# Altium PCB PROC091F.PcbDoc (part 4 of 8)
Units mil, origin at the board's own origin, x right, y up, seen from the top; angles counter-clockwise.
Board outline 3590.95 x 906.17 mil, 8 copper layers (Top Layer, GND1, Sig1, PWR1, PWR2, Sig2, GND2, Bottom Layer), stack 63.146 mil thick; 420 components, 316 nets, 1432 pads, 774 vias.
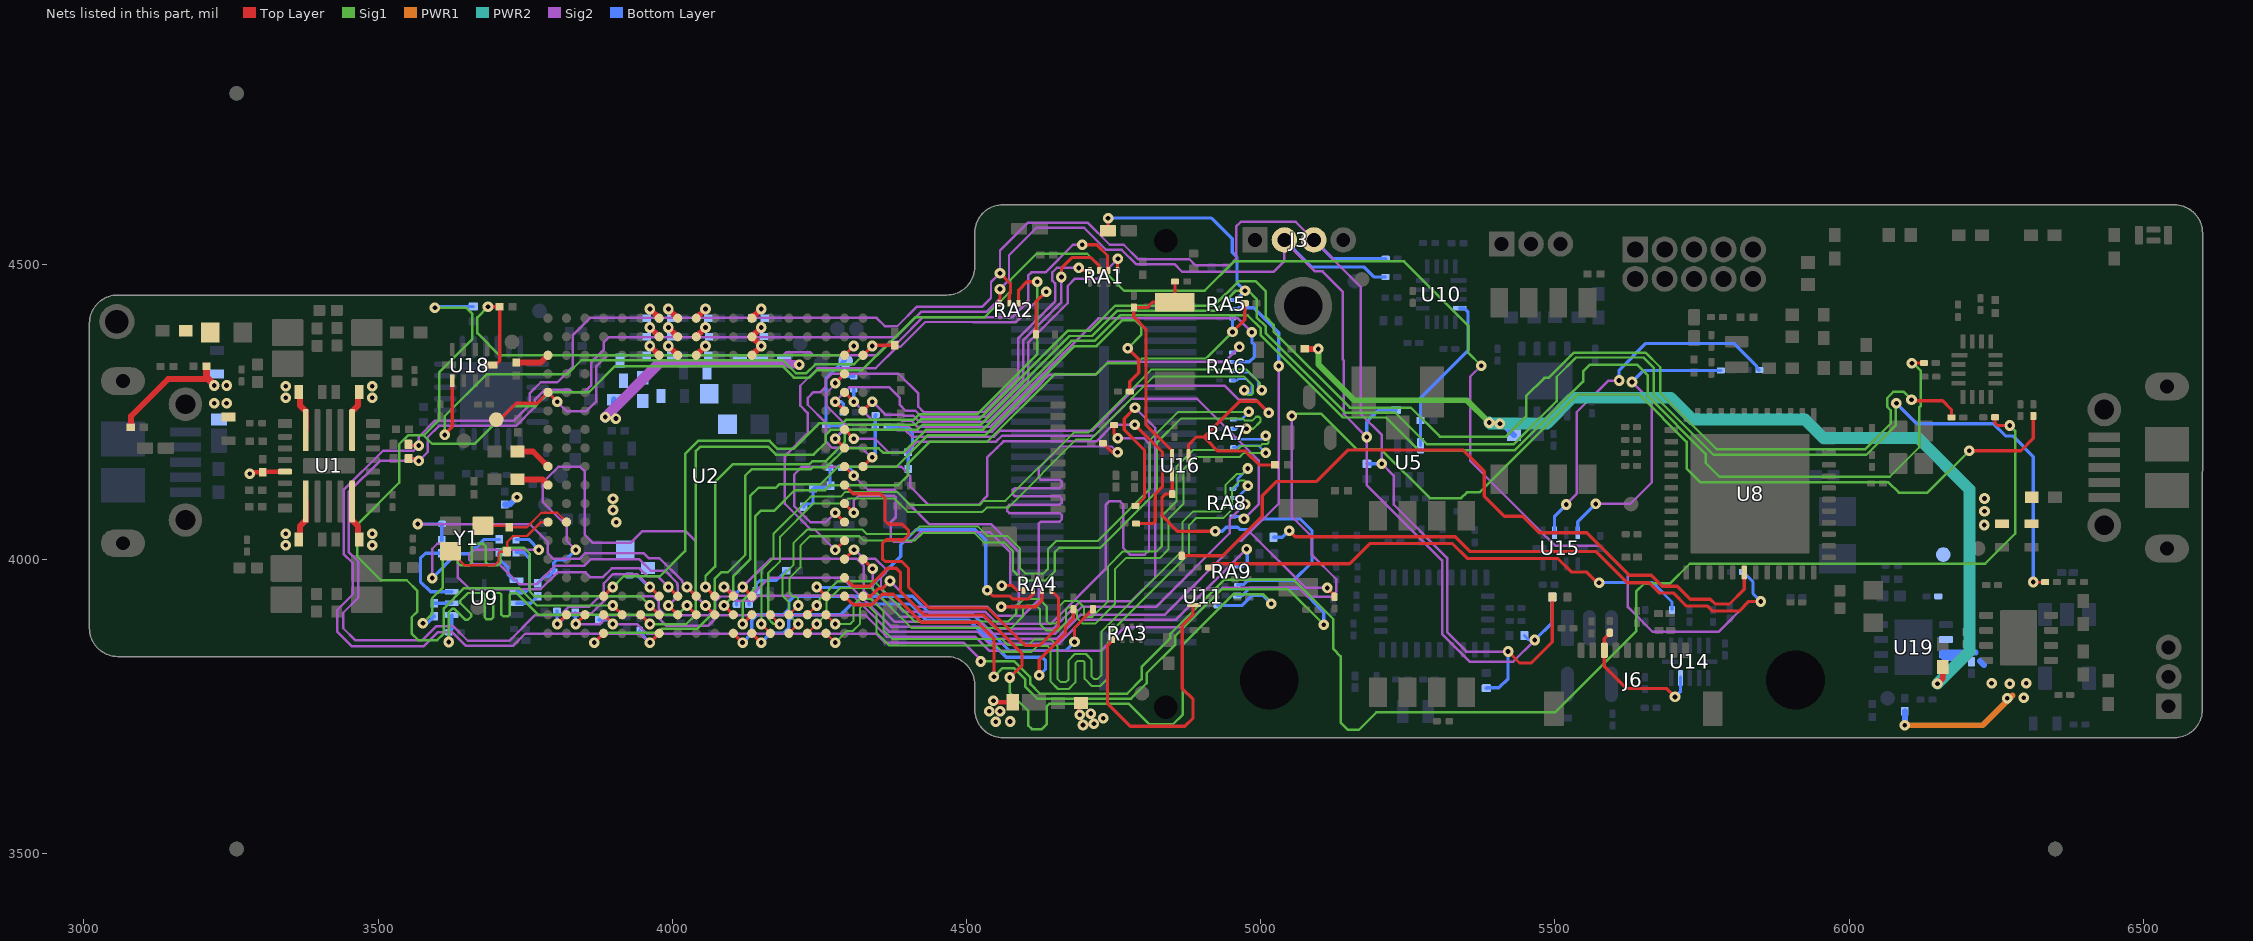
[diagram p9: the nets of this part, all layers, seen from the top]

## Via types
v1: diameter 18, hole 8, Top Layer to Bottom Layer, tented both sides, 737 vias
v2: diameter 19.68, hole 7.87, Top Layer to Bottom Layer, tented both sides, 36 vias
v3: diameter 17, hole 8, Top Layer to Bottom Layer, tented both sides, 1 vias

## Nets (pads, with @x,y where several pads share a name; then routed paths per layer and width w, separated by ;. In a path a pad name is that pad's centre, name@x,y a point inside that pad or via, vN(x,y) a via of type N, cw(c..) or ccw(c..) an arc to the next point about the centre after c; other vN are vias at no path point) (continued)
5V_IN: C1.2 C4.1 C30.1 C50.1 C51.1 C52.1 C53.1 D1.1 D2.1 FL3.2 FL12.2 R39.1 R50.2 R64.1 R107.1 U1.9 U1.13 U1.18 U1.22 U1.26 | length 2301.2
  Top Layer w8: v1(3282,4145) 3284.5,4147.5 C30.1@3304,4147.5 3305.18,4148.68 U1.18@3341.81,4148.68 ; v1@4551.43,3756.69 4551.24,3756.88 D2.1@4578.64,3756.88
  Top Layer w10: R39.1@3079.65,4222.86 3080.01,4222.86 3080.01,4242.86 3142.95,4305.8 3209.86,4305.8 ; C52.1@3367.11,4033.27 3367.11,4055.68 3377.24,4065.81 U1.22@3377.24,4097.89 ; C51.1@3367.11,4283.77 3367.11,4261.36 3377.24,4251.23 U1.13@3377.24,4219.15 ; U1.26@3455.98,4097.89 3455.98,4065.81 3466.11,4055.68 C53.1@3466.11,4033.27 ; U1.9@3455.98,4219.15 3455.98,4251.23 3466.11,4261.36 C50.1@3466.11,4283.77 ; R107.1@5074.64,4357.18 v1@5098.17,4357.18 ; v1(5098,4357.17) v1@5098.15,4357.17 ; v1(6150,3788) 6159,3797 FL3.2@6159,3816.31
  Top Layer w12: R50.2@3208.43,4327.73 3208.43,4309.08 v1@3222.57,4294.93
  Sig1 w10: v1(5098,4357.17) 5098,4331 5159,4270 5350.21,4270 v1(5388.21,4232)
  PWR2 w20: v1(5388.21,4232) 5389.98,4230.23 v1(5406.56,4230.23) 5486,4230.23 5529.77,4274 5697,4274 5734,4237 5925,4237 5956,4206 6117,4206 6204.39,4118.61 6204.39,3842.39 v1(6150,3788)
  Bottom Layer w10: R64.1@3715.38,4092.76 3723.59,4092.76 v1(3736.09,4105.26) ; v1@5408.87,4232 FL12.2@5430.41,4210.46
  other v1: 4549.8,3723.5 4574.04,3724.04 4557.1,3741.4 4538.79,3741.55 4545.8,3759.4 3343.32,4023.52 3489.9,4023.52 3343.32,4043.02 3489.9,4043.02 3221.57,4264.93 3242.57,4264.93 3343.32,4274.02 3489.9,4274.02 3343.32,4293.52 3489.9,4293.52 3221.57,4294.93 3242.57,4294.93
5V_IN_B: C42.2 C122.1 C127.1 FL14.2 TP4.1 U19.6
  other v1: 6229.39,4058 6230,4081.54 6230,4103
5V_IN_SW: C129.1 FL11.1 R27.1 U19.7 | length 387.8
  Top Layer w6: v1@4691.08,3733.43 FL11.1@4691.08,3755.5
  PWR1 w10: v1(6094.58,3717.68) 6227.1,3717.68 6277.87,3768.45
  Bottom Layer w10: v1(6094.58,3717.68) R27.1@6094.58,3741.52 ; U19.7@6157.3,3840.2 6158.2,3841.1 6198.3,3841.1 ; U19.7@6157.5,3836.1 6162.01,3831.6 6191.4,3831.6 6186.3,3836.69 U19.7@6161.94,3836.69 ; 6200,3839.4 6198.3,3841.1 ; 6215.1,3841.1 6198.3,3841.1 ; 6222.1,3826.76 6228.92,3819.94
  other v1: 4698.06,3717.99 4716.52,3720.32 4732.55,3729.58 4692.44,3735.48 4711.02,3737.49 6268.5,3763.5 6296.5,3764.5 6273,3788 6242,3789 6301,3789
ALERT: R38.1 U5.3 U10.4 | length 277.2
  Bottom Layer w5.5: U5.3@5271.66,4192.9 R38.1@5271.66,4235.46 5271.66,4274.01 5352.46,4354.8 5352.46,4419.82 5346.17,4426.11 U10.4@5338.3,4426.11
AR_1P0_RF1: C78.1 C79.1 C80.1 C81.1 L12.2 U2.J16 U2.J17 U2.J18 | length 66.8
  Top Layer w10: U2.J16@4040.73,4346.33 v1(4056.48,4362.08) ; U2.J17@4040.73,4377.83 v1(4056.48,4393.58) ; U2.J18@4040.73,4409.33 v1(4056.48,4425.07)
AR_1P0_RF2: C82.1 C83.1 C84.1 C85.1 FL1.1 L14.2 U2.H16 U2.H17 U2.H18 | length 66.8
  Top Layer w10: v1(3993.49,4362.08) U2.H16@4009.24,4346.33 ; v1(3993.49,4393.58) U2.H17@4009.24,4377.83 ; v1(3993.49,4425.07) U2.H18@4009.24,4409.33
AR_1P2: FL6.1 L13.2
AR_1V4_APLL: C90.1 U2.A10 | length 62.3
  Top Layer w10: C90.1@3737.06,4182.85 3763.27,4182.85 U2.A10@3788.76,4157.36
AR_1V4_SYNTH: C89.1 U2.A9 | length 55.5
  Top Layer w10: C89.1@3737.19,4135.45 3779.18,4135.45 U2.A9@3788.76,4125.86
AR_1V8: FL8.1 FL9.1 FL10.1 L11.2 | length 404.6
  Sig2 w15: 3975.42,4330.59 3976.08,4331.25 ; 3976.08,4332.75 4199.24,4332.75 ; 4199.24,4331.25 4199.33,4331.16 4215.39,4331.16 v1(4215.96,4330.59)
  Sig2 w18: v1(3886.15,4241.31) 3975.42,4330.59
  Bottom Layer w10: v1(3886.15,4241.31) 3888.61,4241.31 3901,4253.7 FL9.1@3901,4271
  other v1: 3904.64,4062.7 3899.25,4083.38 3899.25,4102.38 3904.29,4238.76
AR_BSS_LOGGER: RA2.2 U2.D3 | length 1197.9
  Top Layer w5.5: U2.D3@3883.25,3936.89 v1(3899,3952.63) ; RA2.2@4588.48,4434.82 4588.48,4456.94 4602.74,4471.2 v1(4620,4471.2)
  Sig1 w4.2: v1(3899,3952.63) 3917.29,3970.92 3979.16,3970.92 4021.78,4013.55 4021.78,4178.81 4043.81,4200.84 4165.39,4200.84 4179.07,4187.16 4205.95,4187.16 4249.28,4230.49 4288.94,4230.49 4295.15,4236.7 4409.94,4236.7 4419.12,4245.88 4517.88,4245.88 4620,4348 v1(4620,4471.2)
AR_CS1: R9.2 R139.2 U2.C2 | length 3331.6
  Top Layer w5.5: v1(3836.01,3889.64) U2.C2@3851.76,3905.39 ; v1(6204,4184) 6292,4184 6313,4205 R139.2@6313,4242.98
  Sig1 w4.2: v1(5053,4243.3) 5057,4247.3 5102.7,4247.3 5164.32,4185.68 5205.42,4185.68 5287.4,4103.7 5340.7,4103.7 5350.29,4113.29 5371.69,4113.29 5538.09,4279.7 5643.45,4279.7 5723.89,4199.26 5723.89,4154.03 5747.43,4130.49 6066.87,4130.49 6084.43,4112.93 6132.93,4112.93 v1(6204,4184)
  Sig2 w4.2: v1(3836.01,3889.64) 3877.36,3889.64 3892.66,3904.94 3972.04,3904.94 3990.46,3886.52 4060.75,3886.52 4079.18,3904.94 4328.02,3904.94 4364.57,3868.39 4514.72,3868.39 4539.2,3843.9 4728.57,3843.9 4768.67,3884 4868,3884 4935,3951 5064.76,3951 5080.06,3935.7 5119.48,3935.7 5128.45,3944.66 5128.45,3965.78 5087,4007.23 5087,4038 5053,4072 v1(5053,4243.3)
  Bottom Layer w5.5: R9.2@3835,3909.17 3835,3890.65 v1(3836.01,3889.64)
AR_CS1_60PIN: RA3.1 U11.3 | length 486.5
  Top Layer w5.5: RA3.1@4749.31,3863.01 4739.81,3853.51 4739.81,3754.36 4778.08,3716.09 4871.09,3716.09 4885,3730 4885,3761.65 4866.65,3780 4866.65,3886.76 4884.99,3905.09 U11.3@4884.99,3921.94
AR_CS1_BT: R105.2 U8.30 | length 1222.9
  Top Layer w5.5: R105.2@4865.78,4005.59 4935.59,4005.59 5002.56,4072.56 5002.56,4107.46 5027.1,4132 5094.9,4132 5148.45,4185.56 5343.25,4185.56 5379.8,4149.01 5379.8,4107.15 5414.23,4072.71 5445.66,4072.71 5473.46,4044.92 5554.09,4044.92 5626.54,3972.46 5663.74,3972.46 5682.22,3953.98 5707.75,3953.98 5730.02,3931.71 5764.22,3931.71 5772.3,3923.63 5796.62,3923.63 5821.73,3948.74 U8.30@5821.73,3977.25
AR_CS1_LCD: R76.2 R106.2 | length 857.3
  Top Layer w5.5: R106.2@4912.37,3985.56 4918.93,3992.13 5151.04,3992.13 5185.33,4026.43 5325.91,4026.43 5351.12,4001.21 5504.41,4001.21 5527.37,3978.25 5553.48,3978.25 5571.73,3960 v1(5575,3960)
  Bottom Layer w5.5: v1(5575,3960) 5666.02,3960 5698.97,3927.05 R76.2@5698.97,3914.47
AR_CS1_LCD_T: J6.3 R183.1 U14.4 | length 239.1
  Top Layer w5.5: R183.1@5593.19,3873.82 5583.95,3864.58 J6.3@5583.95,3845.06 5583.95,3818.24 5622.3,3779.89 5689.95,3779.89 v1(5704.03,3765.81)
  Bottom Layer w5.5: v1(5704.03,3765.81) 5713.48,3775.26 U14.4@5713.48,3797.8 U14.4@5713.48,3799.77
AR_DMM_CLK: R11.1 U2.U3 | length 1270.4
  Top Layer w5.5: U2.U3@4292.7,3936.89 4307.32,3922.26 4338.99,3922.26 4357.08,3940.36 4375.65,3940.36 4423.2,3892.8 4518.93,3892.8 4546.57,3865.15 v1(4546.57,3799.81)
  Sig1 w4.2: v1(4546.57,3799.81) 4561.46,3814.7 4580.9,3814.7 4600.07,3795.53 4600.07,3782.93 4620.19,3762.81 4779.81,3762.81 4806,3789 4806,3806 4855,3855 4855,3869.71 4934.29,3949 5046.57,3949 v1(5107.05,3888.52)
  Bottom Layer w5.5: R11.1@4960.02,3937.94 4968.46,3937.94 4980.77,3950.25 5066.75,3950.25 5107.05,3909.95 v1(5107.05,3888.52)
AR_DMM_SYNC: R10.1 U2.U4 | length 1283.7
  Top Layer w5.5: U2.U4@4292.7,3968.38 4307.32,3953.76 4335.57,3953.76 4366.31,3984.5 4380.6,3984.5 4388,3977.1 4388,3944.27 4427.07,3905.2 4528.29,3905.2 4594.49,3839 4594.49,3819.69 v1(4573.55,3798.74)
  Sig1 w4.2: v1(4573.55,3798.74) 4573.55,3773.45 4605,3742 4605,3717 4611,3711 4628,3711 4636,3719 4636,3749.41 4641,3754.41 4775.59,3754.41 4810.94,3719.06 4850.56,3719.06 4867.66,3736.15 4867.66,3854.66 4953.6,3940.6 5004,3940.6 5018,3926.6 v1(5018,3924)
  Bottom Layer w5.5: R10.1@4927.02,3921 4967.78,3921 4985.53,3938.75 5003.25,3938.75 v1(5018,3924)
AR_DP0: R88.1 U2.U7 | length 1102
  Top Layer w5.5: v1(4276.95,4078.62) U2.U7@4292.7,4062.87 ; v1(4786.14,4228.21) 4833.25,4181.1 4833.25,4123.66 4820.91,4111.32 4820.91,4064.23 4817.01,4060.33 R88.1@4789.21,4060.33
  Sig2 w4.2: v1(4276.95,4078.62) 4261.23,4062.89 4234.4,4062.89 4207.08,4090.21 4207.08,4100.94 4207.08,4111.59 4207.08,4143.33 4220.78,4157.04 4389.09,4157.04 4404.46,4141.67 4404.46,4123.28 4435.52,4092.22 4519.97,4092.22 4535.14,4107.38 4535.14,4172.74 4551.69,4189.3 4551.95,4189.3 4562.68,4200.02 4721.12,4200.02 4749.31,4228.21 v1(4786.14,4228.21)
AR_DP1: R130.1 U2.U6 | length 924.9
  Top Layer w5.5: v1(4276.95,4015.63) U2.U6@4292.7,4031.37 ; R130.1@4617.95,4383.18 4617.95,4437.33 4635.19,4454.56 v1(4635.35,4454.4)
  Sig2 w4.2: v1(4276.95,4015.63) 4242.74,4049.83 4235.58,4049.83 4191.3,4094.11 4191.3,4175.11 4230,4213.81 4230,4248.45 4217.54,4260.92 4217.54,4294.54 4247.25,4324.25 4345.44,4324.25 4381.77,4360.58 4387.52,4360.58 4429.85,4402.91 4475.18,4402.91 4511.29,4402.91 4511.35,4402.85 4583.81,4402.85 v1(4635.35,4454.4)
AR_DP2: R132.1 U2.V5 | length 1098.3
  Top Layer w5.5: U2.V5@4324.64,3999.43 v1(4340.39,3983.68) ; v1(4786.37,4257.18) 4768.03,4238.84 4768.03,4219.51 4802.49,4185.05 4802.49,4104.7 R132.1@4788.36,4090.57
  Sig2 w4.2: v1(4340.39,3983.68) 4340.39,3948.49 4386.9,3901.99 4528.64,3901.99 4548.94,3881.69 4646.96,3881.69 4694,3928.72 4780.31,3928.72 4820.7,3969.11 4820.7,4222.85 v1(4786.37,4257.18)
AR_DP3: R133.1 U2.U5 | length 1103.4
  Top Layer w5.5: U2.U5@4293.15,4000.33 v1(4308.9,4016.07) ; R133.1@4750.69,4227.63 4750.69,4211.75 v1(4756.94,4205.49)
  Sig2 w4.2: v1(4308.9,4016.07) 4310.02,4016.07 4325.77,4000.33 4345.39,4000.33 4362,3983.71 4362,3976.46 4354.7,3969.16 4354.7,3949.12 4393.43,3910.39 4532.11,3910.39 4552.41,3890.09 4643.49,3890.09 4736.28,3982.88 4736.28,4091.85 4742.4,4097.98 4761.3,4097.98 4766.06,4093.22 4766.06,4019.21 4777.65,4007.61 4802.88,4007.61 4810.15,4014.88 4810.15,4196.59 4801.24,4205.49 v1(4756.94,4205.49)
AR_DP4: R135.1 U2.V3 | length 1157.1
  Top Layer w5.5: U2.V3@4324.2,3936.89 4337.35,3936.89 4350.32,3949.86 4357.03,3949.86 v1(4370,3962.82) ; R135.1@4732.07,4196.8 4747.41,4181.46 v1(4756.8,4181.46)
  Sig2 w4.2: v1(4370,3962.82) 4414.04,3918.79 4535.59,3918.79 4550.54,3903.84 4595.78,3903.84 4622.63,3930.69 4622.63,4029.66 4622.63,4060.28 4626.18,4063.83 4658.3,4063.83 4661.85,4067.38 4661.85,4074.48 4658.3,4078.03 4622.63,4078.03 4572.87,4078.03 4569.32,4081.58 4569.32,4088.68 4572.87,4092.23 4622.63,4092.23 4658.15,4092.23 4661.7,4095.78 4661.7,4102.88 4658.15,4106.43 4622.63,4106.43 4582.47,4106.43 4578.92,4109.98 4578.92,4117.08 4582.47,4120.63 4622.63,4120.63 4658.3,4120.63 4661.85,4124.18 4661.85,4131.28 4658.3,4134.83 4626.18,4134.83 4622.63,4138.38 4622.63,4141.93 4622.63,4154.35 4659.61,4191.33 4746.93,4191.33 v1(4756.8,4181.46)
AR_DP5: R137.1 U2.M1 | length 745.7
  Top Layer w5.5: U2.M1@4135.22,3873.89 v1(4150.97,3858.15) ; v1(4623.77,3802.58) 4623.77,3829.27 4667.89,3873.39 4667.89,3884.63 4681.54,3898.29 R137.1@4681.54,3914.69
  Bottom Layer w5.5: v1(4150.97,3858.15) 4166.72,3873.9 4176.3,3873.9 4176.39,3873.99 4188.95,3873.99 4198.11,3883.16 4198.11,3895.93 4207.67,3905.49 4286.39,3905.49 4304.8,3923.9 4404.12,3923.9 4431.61,3896.41 4504.41,3896.41 4567.49,3833.32 4628.48,3833.32 4634.4,3827.4 4634.4,3813.21 v1(4623.77,3802.58)
AR_DP6: R138.1 U2.L2 | length 1153.9
  Top Layer w5.5: v1(4087.98,3921.14) U2.L2@4103.72,3905.39 ; v1(4774.14,4358.34) 4792.59,4339.89 4792.59,4316.78 4777.4,4301.59 R138.1@4777.4,4284.46
  Sig1 w4.2: v1(4087.98,3921.14) 4103.28,3936.44 4103.28,3970.27 4132.4,3999.39 4132.4,4107 4146.71,4121.31 4176,4121.31 4181.7,4127.01 4251.5,4127.01 4281.4,4156.91 4380.91,4156.91 4434.86,4210.86 4532.1,4210.86 4683.32,4362.08 4720.96,4362.08 4764.48,4405.6 4787.14,4405.6 4797.34,4395.41 4797.34,4381.53 v1(4774.14,4358.34)
AR_DP7: R140.1 U2.L1 | length 752
  Top Layer w5.5: U2.L1@4103.72,3873.89 v1(4119.47,3858.15) ; v1(4683.56,3859.2) 4683.56,3883.42 R140.1@4714.81,3914.68
  Bottom Layer w5.5: v1(4119.47,3858.15) 4135.23,3873.9 4135.23,3896.22 4144.4,3905.39 4188.85,3905.39 4198.31,3914.85 4198.31,3927.62 4207.48,3936.79 4408.21,3936.79 4437.09,3907.91 4509.17,3907.91 4572.26,3844.82 4669.18,3844.82 v1(4683.56,3859.2)
AR_GPIO_0: R66.1 RA5.8 U2.M2 | length 1247.4
  Top Layer w5.5: v1(4119.47,3889.64) U2.M2@4135.22,3905.39 ; v1(4952,4386) 4972.88,4406.88 R66.1@4972.88,4434.77
  Sig1 w4.2: v1(4119.47,3889.64) 4119.47,3928.77 4140.8,3950.1 4140.8,4072.57 4150.14,4081.91 4172.91,4081.91 4208.14,4117.14 4259.64,4117.14 4268.36,4125.86 4384.06,4125.86 4400.5,4142.3 4400.5,4162.2 4437.86,4199.56 4535.36,4199.56 4649.8,4314 4719.9,4314 4738.7,4332.8 4789.7,4332.8 4797.8,4340.9 4906.9,4340.9 v1(4952,4386)
  Bottom Layer w5.5: v1(4952,4386) 4952,4408.75 RA5.8@4952.34,4409.09
AR_GPIO_1: R129.2 RA5.7 U2.L3 | length 1696.1
  Top Layer w5.5: v1(4087.98,3952.63) U2.L3@4103.72,3936.89 ; v1(5113.15,3951) R129.2@5125.2,3938.94
  Sig2 w4.2: v1(4087.98,3952.63) 4091.71,3952.63 4099.51,3944.84 4105.63,3944.84 4113.14,3937.33 4133.62,3937.33 4164.22,3967.93 4288.79,3967.93 4371.53,3885.19 4521.68,3885.19 4541.98,3864.89 4653.92,3864.89 4694.64,3905.61 4837.03,3905.61 4962.72,4031.3 4967.81,4031.3 4982.07,4045.57 ; v1@5030.5,4328.13 5030.5,4093.99 4982.07,4045.57 ; v1(5113.15,3951) 5076.64,3951 4982.07,4045.57
  Bottom Layer w5.5: RA5.7@4952.34,4424.84 4953.03,4425.54 4960.71,4425.54 4962.27,4427.09 4988.12,4427.09 5030.72,4384.49 v1(5030.72,4328.13)
AR_GPIO_2: LD3.1 R115.1 RA5.6 U2.K3 | length 3607.2
  Top Layer w4.2: v1(6312.97,3961) R115.1@6332.97,3961
  Top Layer w5.5: v1(4056.48,3952.63) U2.K3@4072.23,3936.89 ; LD3.1@4740.42,4558.15 4740.42,4579.31 v1(4740.56,4579.45)
  Sig1 w4.2: v1(4056.48,3952.63) 4056.48,3971.07 4072.68,3987.27 4072.68,4131.08 4102.91,4161.31 4233.07,4161.31 4237.92,4166.16 4260.14,4166.16 4293.15,4199.16 4293.15,4210.94 4302.11,4219.9 4314.79,4219.9 4416.9,4219.9 4425.61,4228.61 4524.36,4228.61 4674.89,4379.13 4713.09,4379.13 4756.36,4422.4 4924.28,4422.4 4958.04,4456.16 v1(4973.31,4456.16) 4978.84,4456.16 4993,4442 4993,4410.84 5008.7,4395.14 5008.7,4383.67 5143.37,4249 5228.6,4249 5282.1,4195.5 5430.13,4195.5 5503,4268.37 5503,4309.88 5535.72,4342.6 5650.52,4342.6 5667.56,4325.56 5667.56,4279.35 5769.91,4177 6029,4177 6079.07,4227.07 6079.07,4265.93 v1(6080.37,4264.63)
  Bottom Layer w5.5: v1(4740.56,4579.45) 4916.49,4579.45 4951.75,4544.19 4951.75,4521.43 4959.61,4513.57 4959.61,4469.87 v1(4973.31,4456.16) 4957.74,4440.59 RA5.6@4952.34,4440.59 ; v1@6079.07,4265.93 v1(6080.37,4264.63) 6115,4230 6244.9,4230 6265.65,4209.25 6277.75,4209.25 6312.97,4174.03 v1(6312.97,3961)
AR_HOSTINTR1: R3.1 RA9.6 U2.B2 | length 1425.4
  Top Layer w5.5: v1(3804.51,3889.64) U2.B2@3820.26,3905.39
  Sig2 w4.2: v1(3804.51,3889.64) 3806.53,3889.64 3824.85,3907.96 3862.94,3907.96 3892.18,3937.2 3967.57,3937.2 3977.29,3927.47 3977.29,3915.77 3978.19,3914.88 3978.19,3914.8 3988.05,3904.94 4061.92,3904.94 4072.68,3915.7 4072.68,3927.47 4081.64,3936.44 4102.15,3936.44 4109.66,3928.93 4137.13,3928.93 4145.53,3937.33 4307.51,3937.33 4368.05,3876.79 4518.2,3876.79 4538.5,3856.49 4657.4,3856.49 4698.12,3897.21 4856.21,3897.21 v1(4976,4017)
  Bottom Layer w5.5: R3.1@3804.15,3912.76 3804.15,3890 v1(3804.51,3889.64) ; RA9.6@4960.68,3987.64 4969.78,3987.64 4977,3994.85 4977,4016 v1(4976,4017)
AR_LVDS_0_N: RA6.7 U2.N1 | length 1235.7
  Top Layer w4: v1(4150.97,3889.64) U2.N1@4166.72,3873.89
  Sig1 w3.5: v1(4150.97,3889.64) 4151.55,3890.22 4151.55,3981.11 4171.69,4001.25 4171.69,4042.71 4235.17,4106.2 4286.1,4106.2 4294.1,4114.2 4382.36,4114.2 4404.66,4091.9 4522.5,4091.9 4529.55,4098.95 4566.09,4098.95 4682.04,4214.9 4706.68,4214.9 4813.68,4321.9 4975.86,4321.9 4998.34,4299.42 4998.34,4290.64 v1(5001.79,4287.19)
  Bottom Layer w4: RA6.7@4951.92,4319.52 4959.91,4319.52 4962.29,4317.15 4979.99,4317.15 4995.79,4301.35 4995.79,4293.19 v1(5001.79,4287.19)
AR_LVDS_0_P: RA6.8 U2.N2 | length 1235.8
  Top Layer w4: U2.N2@4166.72,3905.39 v1(4182.46,3889.64)
  Sig1 w3.5: v1(4182.46,3889.64) 4172.11,3889.64 4163.08,3898.67 4163.08,3976.39 4183.19,3996.49 4183.19,4037.94 4239.94,4094.7 4290.86,4094.7 4298.86,4102.7 4377.6,4102.7 4399.9,4080.4 4527.2,4080.4 4534.25,4087.45 4570.85,4087.45 4686.8,4203.4 4711.45,4203.4 4818.45,4310.4 4971.1,4310.4 4986.84,4294.66 4986.84,4281.78 4983.61,4278.54 4978.47,4278.54 4971.79,4285.21 v1(4971.79,4287.19)
  Bottom Layer w4: RA6.8@4951.92,4303.77 4959.91,4303.77 4962.29,4306.15 4975.44,4306.15 4984.79,4296.79 4984.79,4284.28 4981.66,4281.15 4981.39,4280.86 4978.13,4280.86 v1(4971.79,4287.19)
AR_LVDS_1_N: RA7.5 U2.P1 | length 1236.9
  Top Layer w4: U2.P1@4198.21,3873.89 v1(4213.96,3889.64)
  Sig1 w3.5: v1(4213.96,3889.64) 4198.21,3905.39 4198.21,3926.53 4187.47,3937.27 4187.47,3971.89 4206.2,3990.62 4206.2,4027.46 4229.08,4050.35 4322.62,4050.35 4330.06,4042.9 4407.6,4042.9 4420.41,4055.71 4519.06,4055.71 4535.16,4039.6 4569.26,4039.6 4590.61,4018.26 4590.61,3985.36 4600.71,3975.25 4630.15,3975.25 4638.51,3983.61 4638.51,4016.74 4652.59,4030.82 4723.05,4030.82 4812.2,4119.96 4812.2,4202.86 4859.61,4250.28 4979.65,4250.28 v1(4979.65,4250.36)
  Bottom Layer w4: RA7.5@4953.34,4237.27 4967.43,4237.27 4979.65,4249.49 v1(4979.65,4250.36)
AR_LVDS_1_P: RA7.6 U2.P2 | length 1238.7
  Top Layer w4: U2.P2@4198.21,3905.39 v1(4213.96,3921.14)
  Sig1 w3.5: v1(4213.96,3921.14) 4213.96,3932.73 4210.37,3936.32 4204.69,3936.32 4198.97,3942.04 4198.97,3967.13 4217.7,3985.85 4217.7,4022.7 4233.85,4038.85 4317.85,4038.85 4325.3,4031.4 4412.36,4031.4 4425.17,4044.21 4514.29,4044.21 4530.4,4028.1 4564.5,4028.1 4579.11,4013.49 4579.11,3980.59 4595.95,3963.75 4634.92,3963.75 4650.01,3978.85 4650.01,4011.97 4657.35,4019.32 4727.82,4019.32 4823.7,4115.2 4823.7,4198.1 4864.38,4238.78 4970.01,4238.78 4973.38,4235.41 4985.84,4235.41 4992.32,4241.88 4997.31,4241.88 4999.56,4239.63 4999.56,4233.89 4987.2,4221.53 v1(4975.73,4221.53) v1@4975.73,4221.61
  Bottom Layer w4: RA7.6@4953.34,4221.53 4958.16,4221.53 4962.91,4226.27 4970.98,4226.27 v1(4975.73,4221.53)
AR_LVDS_CLK_N: RA7.7 U2.R2 | length 1236.7
  Top Layer w4: U2.R2@4229.71,3905.39 v1(4245.46,3921.14)
  Sig1 w3.5: v1(4245.46,3921.14) 4250.5,3926.18 4250.5,3932.09 4280.77,3962.36 4343.54,3962.36 4411.66,3894.25 4571.32,3894.25 4584.54,3907.46 4584.54,3919.41 4597.67,3932.55 4623.26,3932.55 4636.4,3919.42 4636.4,3894.34 4640.5,3890.23 4650.74,3890.23 4657.7,3897.19 4657.7,3919.66 4667,3928.97 4688.58,3928.97 4699.67,3917.88 4699.67,3904.32 4702.3,3901.69 4714,3901.69 4740.68,3928.37 4740.68,3987.7 4765.98,4013 4823.52,4013 4831.85,4021.33 4831.85,4073.27 4856.96,4098.38 4856.96,4157.06 4885.22,4185.33 4960.01,4185.33 4966.58,4191.9 4998.96,4191.9 5002.41,4195.35 5010.84,4195.35 5013.13,4197.64 5013.13,4204.87 v1(5008.6,4209.4)
  Bottom Layer w4: RA7.7@4953.34,4205.78 4961.34,4205.78 4963.72,4203.4 4992.27,4203.4 ; 4992.28,4203.4 5002.6,4203.4 v1(5008.6,4209.4)
AR_LVDS_CLK_P: RA7.8 U2.R1 | length 1235.6
  Top Layer w4: U2.R1@4229.71,3873.89 v1(4245.46,3889.64)
  Sig1 w3.5: v1(4245.46,3889.64) 4262,3906.19 4262,3927.33 4285.53,3950.86 4338.78,3950.86 4406.89,3882.75 4576.09,3882.75 4596.04,3902.7 4596.04,3914.65 4602.44,3921.05 4618.5,3921.05 4624.9,3914.65 4624.9,3889.58 4635.74,3878.73 4655.5,3878.73 4669.2,3892.43 4669.2,3914.37 4672.29,3917.47 4683.82,3917.47 4688.17,3913.11 4688.17,3899.56 4697.54,3890.19 4718.77,3890.19 4752.18,3923.6 4752.18,3982.94 4770.75,4001.5 4828.29,4001.5 4843.35,4016.56 4843.35,4068.5 4868.46,4093.61 4868.46,4152.3 4889.99,4173.83 4964.78,4173.83 4971.35,4180.4 v1(5008.6,4180.4)
  Bottom Layer w4: RA7.8@4953.34,4190.03 4961.34,4190.03 4963.72,4192.4 4987.72,4192.4 4996.6,4192.4 v1(5008.6,4180.4)
AR_LVDS_FRCLK_N: RA8.5 U2.T2 | length 1234.7
  Top Layer w4: U2.T2@4261.2,3905.39 v1(4276.95,3889.64)
  Sig1 w3.5: v1(4276.95,3889.64) 4302.37,3889.64 4307.79,3895.06 4307.79,3921.8 4318.23,3932.23 4337.81,3932.23 4358.82,3911.22 4358.82,3879.44 4373.94,3864.32 4559.76,3864.32 4570.08,3854 4605.74,3854 4615.24,3863.5 4642.93,3863.5 4654.4,3852.03 4654.4,3796.6 4660.23,3790.77 4668.84,3790.77 4673.44,3795.37 4673.44,3828.02 4684.1,3838.67 4703.01,3838.67 4712.34,3829.34 4712.34,3801.17 4717.6,3795.91 4722.41,3795.91 4729.13,3802.63 4729.13,3876.65 4866.74,4014.26 4866.74,4062.56 4885.24,4081.06 4931.87,4081.06 4939.98,4089.16 4939.98,4125.23 4959.7,4144.96 4969.2,4144.96 v1(4978.15,4153.91)
  Bottom Layer w4: RA8.5@4952.69,4119.49 4954.75,4119.49 4961.25,4126 4961.25,4137.01 v1(4978.15,4153.91)
AR_LVDS_FRCLK_P: RA8.6 U2.T1 | length 1234.2
  Top Layer w4: U2.T1@4261.2,3873.89 v1(4276.95,3858.15)
  Sig1 w3.5: v1(4276.95,3858.15) 4296.95,3878.14 4307.14,3878.14 4319.29,3890.3 4319.29,3917.03 4322.99,3920.73 4333.04,3920.73 4347.32,3906.46 4347.32,3874.68 4369.18,3852.82 4550.24,3852.82 4560.56,3842.5 4610.5,3842.5 4620,3852 4638.16,3852 4642.9,3847.26 4642.9,3791.83 4655.47,3779.27 4673.6,3779.27 4684.94,3790.61 4684.94,3823.25 4688.86,3827.17 4698.24,3827.17 4700.84,3824.58 4700.84,3796.41 4712.84,3784.41 4727.18,3784.41 4740.63,3797.86 4740.63,3871.89 4878.24,4009.49 4878.24,4057.8 4890,4069.56 4936.64,4069.56 4951.48,4084.4 4951.48,4120.47 4964.47,4133.46 4972.45,4133.46 4978.25,4127.66 v1(4978.25,4124.51)
  Bottom Layer w4: RA8.6@4952.69,4103.74 4959.55,4103.74 4978.25,4122.44 v1(4978.25,4124.51)
AR_MCUCLKOUT: RA1.1 U2.V13 | length 645.6
  Top Layer w5.5: U2.V13@4324.2,4251.85 v1(4339.94,4267.59) ; RA1.1@4756.3,4490.32 RA1.1@4756.8,4490.32 4756.8,4509.89 v1(4757.37,4510.46)
  Sig2 w4.2: v1(4339.94,4267.59) 4357,4250.54 4362.44,4245.1 4391.75,4245.1 4393.12,4243.74 4409.56,4243.74 4420.13,4233.16 4536.42,4233.16 4604.57,4301.31 4604.57,4367.63 4672,4435.06 4672,4464.08 4684.7,4476.78 4723.69,4476.78 v1(4757.37,4510.46)
AR_MISO1: R121.2 U2.D1 | length 3090.6
  Top Layer w5.5: v1(3867.5,3858.15) U2.D1@3883.25,3873.89 ; v1@6108.64,4333 6109,4333 6109.23,4333.23 R121.2@6127.22,4333.23
  Sig1 w4.2: v1(3867.5,3858.15) 3884.4,3875.04 3975.37,3875.04 3982.08,3881.75 4042.55,3881.75 4072.59,3911.79 4072.59,3966.9 4083.09,3977.41 4094.31,3977.41 4124,4007.09 4124,4141.74 4134.66,4152.4 4235.06,4152.4 4238.92,4156.26 4262.13,4156.26 4294.27,4188.41 4350.62,4188.41 4358.63,4180.4 4391.83,4180.4 4431.01,4219.57 4527.21,4219.57 4678.37,4370.73 4717.73,4370.73 4761,4414 4977.96,4414 5000.3,4391.66 5000.3,4380.19 5139.89,4240.6 5213,4240.6 5268.9,4184.7 5431.21,4184.7 5548,4301.49 5548,4319 5559,4330 5640,4330 5658,4312 5658,4277.03 5756.18,4178.86 5756.18,4163.67 5779.85,4140 6069.02,4140 6119.07,4190.05 6119.07,4257.8 6121.3,4260.03 6121.3,4320.34 v1@6108.64,4333
  other v1: 6106.64,4333
AR_MOSI1: R128.2 U2.F2 | length 3074.5
  Top Layer w5.5: U2.F2@3946.24,3905.39 v1(3961.99,3889.64) ; v1@6104,4269 v1(6106,4271) 6107.75,4269.25 6158.75,4269.25 6173.9,4254.1 R128.2@6173.9,4240.71
  Sig1 w4.2: v1(3961.99,3889.64) 4023.85,3889.64 4040.28,3906.08 4040.28,3950.8 4040.28,4183.75 4047.75,4191.21 4162.53,4191.21 4176.13,4177.61 4240.1,4177.61 4260.76,4198.26 4260.76,4210.94 4269.72,4219.9 4290.23,4219.9 4298.63,4228.3 4413.42,4228.3 4422.6,4237.48 4521.36,4237.48 4671.41,4387.53 4671.76,4387.88 4709.88,4387.88 4752.8,4430.8 4920.8,4430.8 4961.97,4471.97 4991.75,4471.97 5008.9,4454.83 5008.9,4411.26 5022,4398.16 5022,4387 5151.6,4257.4 5255,4257.4 5304.4,4208 5417,4208 5451,4242 5451,4277.02 5482,4308.02 5489.26,4308.02 5532.24,4351 5654,4351 5679,4326 5679,4282.47 5774.97,4186.5 6026.62,4186.5 6070.67,4230.55 6070.67,4252.69 6064.36,4259 6064.36,4273.36 6075,4284 6093,4284 v1(6106,4271)
AR_MSS_LOGGER: R58.1 R62.2 R131.1 U2.E2 | length 5198.3
  Top Layer w5.5: v1(3899,3921.14) U2.E2@3914.75,3905.39 ; v1(5048.37,4048.33) 5058.78,4037.93 5330.67,4037.93 5355.88,4012.71 5570.03,4012.71 5622.99,3959.75 5660.19,3959.75 5677.46,3942.48 5701.28,3942.48 5723.55,3920.21 5759.46,3920.21 5768.01,3911.66 5813.11,3911.66 5829.44,3928 v1(5850,3928)
  Sig1 w4.2: v1(3596.65,4427.2) 3649.51,4427.2 3660.27,4416.45 3660.27,4373.72 3603.65,4317.11 3603.65,4236.31 3577.64,4210.3 ; v1(3899,3921.14) 3769.66,3921.14 3740,3950.8 3646.32,3950.8 3611.78,3916.26 3611.78,3873.46 3600.32,3861.99 3568.47,3861.99 3557,3873.47 3557,3901.22 3567,3911.22 3567,3945.79 3548.79,3964 3505,3964 3465,4004 3465,4059.02 3535.96,4129.97 3535.96,4195.26 3551,4210.3 3577.64,4210.3 ; v1(5374.72,4328.62) 5352.46,4350.89 5352.46,4397.08 5243.73,4505.8 4954.35,4505.8 4904.55,4456 4768,4456 4705.16,4518.84 4619.07,4518.84 4574.06,4473.83 4574.06,4454.4 4530.98,4411.31 4413.43,4411.31 4372,4369.88 4371.53,4369.88 4322.7,4321.05 4245.78,4321.05 4233.02,4308.29 4206.72,4308.29 4187.01,4328 3902.82,4328 3858,4283.18 3791.2,4283.18 3767.82,4259.8 3727.83,4259.8 3663.79,4195.75 3592.18,4195.75 3577.64,4210.3
  Sig2 w4.2: 5356.11,4218.7 5356.11,4245.3 ; 5356.13,4218.69 5356.13,4166.89 5469.8,4053.21 5500.11,4022.9 5575.81,4022.9 5624.1,3974.62 5624.1,3918.36 5666.26,3876.19 5777.64,3876.19 5829.44,3928 v1(5850,3928) ; 5356.13,4245.31 5356.13,4310.03 v1(5374.72,4328.62)
  Bottom Layer w5.5: v1(3596.65,4427.2) 3598.81,4429.36 R62.2@3662,4429.36 ; R58.1@5021.79,4036.94 5036.79,4036.94 5048.18,4048.33 v1(5048.37,4048.33) ; R131.1@5819.37,3978.41 5836.62,3961.16 5836.62,3941.38 v1(5850,3928)
AR_NERR_OUT: R21.1 RA6.5 U2.U15 | length 899.2
  Top Layer w5.5: v1(4276.95,4299.09) U2.U15@4292.7,4314.84
  Sig2 w4.2: v1(4276.95,4299.09) 4276.95,4297.07 4261.65,4281.77 4261.65,4261.26 4294.61,4228.3 4384.8,4228.3 4386.16,4226.94 4400.1,4226.94 4410.67,4216.36 4543.38,4216.36 4621.37,4294.35 4640.62,4313.6 4719.2,4313.6 4740.85,4335.25 4761.07,4335.25 4938.51,4335.25 v1(4963.86,4360.6)
  Bottom Layer w5.5: v1(4276.95,4299.09) 4288.62,4310.76 R21.1@4308.45,4310.76 ; RA6.5@4951.92,4351.02 4954.28,4351.02 v1(4963.86,4360.6)
AR_NERRIN: R22.1 RA6.6 U2.U14 | length 908.2
  Top Layer w5.5: U2.U14@4292.7,4283.34 v1(4308.45,4267.59)
  Sig2 w4.2: v1(4308.45,4267.59) 4339.34,4236.7 4388.27,4236.7 4389.64,4235.34 4406.08,4235.34 4416.65,4224.76 4539.9,4224.76 4724.04,4408.9 4961.42,4408.9 v1(4985,4385.32)
  Bottom Layer w5.5: v1(4308.45,4267.59) R22.1@4308.45,4288.76 ; RA6.6@4951.92,4335.27 4980.71,4335.27 4989.59,4344.15 4989.59,4363.81 4985,4368.4 v1(4985,4385.32)
AR_NRST: C130.1 R59.1 R108.1 TP14.1 U2.U11 U16.4 | length 1351.6
  Top Layer w5.5: v1(4276.95,4204.6) U2.U11@4292.7,4188.85 ; U16.4@4877.15,4175.21 4877.37,4175.43 4877.37,4194.43 4890.4,4207.46 4903.41,4207.46 ; v1(5013.53,4248.65) 4994.07,4268.11 4964.06,4268.11 4908.95,4213 ; R108.1@5024.3,4159.98 4997.18,4159.98 4973.58,4183.58 4927.3,4183.58 4908.95,4201.93 ; 4903.41,4207.46 4908.95,4201.93 ; 4903.41,4207.46 4908.95,4213 ; 4908.95,4201.93 4908.95,4213
  Sig2 w4.2: v1(4276.95,4204.6) 4292.25,4219.9 4381.32,4219.9 4382.68,4218.54 4396.62,4218.54 4407.19,4207.96 4546.86,4207.96 4557.16,4218.26 4714.15,4218.26 4750.8,4254.91 4750.8,4255.13 4790.1,4294.43 4939.23,4294.43 4963.18,4270.48 4991.7,4270.48 v1(5013.53,4248.65)
  Bottom Layer w5.5: v1(4276.95,4204.6) 4289.15,4216.8 R59.1@4289.15,4223.19 ; R59.1@4290.72,4224.76 R59.1@4289.15,4223.19 ; TP14.1@4294.6,4337.1 4291.1,4337.1 4261.3,4307.3 4261.3,4228.4 C130.1@4261.7,4228 4263.32,4226.38 4286.81,4226.38 4289.15,4224.04 R59.1@4289.15,4223.19
AR_NRST_1: R177.2 RA9.8 U16.1 | length 565.2
  Top Layer w5.5: U16.1@4849.59,4143.71 R177.2@4849.59,4110.46 4837.62,4110.46 4832.41,4105.25 4832.41,4073.43 4858.37,4047.46 v1(4922.74,4047.46)
  Bottom Layer w5.5: v1(4922.74,4047.46) 4935,4047.46 4941.54,4054 4960.76,4054 4964.26,4050.5 4983.79,4050.5 5001.38,4068.09 5067.09,4068.09 5087.12,4048.06 5087.12,3995 5056.12,3964 4978.25,3964 4971.09,3956.83 4961.37,3956.83 RA9.8@4960.68,3956.14
AR_NRST_2: C120.1 R124.1 SW2.1 U16.6 | length 387.8
  Top Layer w5.5: U16.6@4849.59,4175.21 4849.59,4183.68 4804.95,4228.32 4804.95,4390.94 4784.37,4411.52 C120.1@4784.37,4427.45 4806.96,4427.45 4816.38,4436.87 SW2.1@4854.16,4436.87 R124.1@4854.16,4471.7
AR_OSC_CLKOUT: RA1.2 TP17.1 U2.A14 | length 1287.4
  Top Layer w5.5: TP17.1@3701,4237 3706.66,4237 3734.51,4264.85 3770.28,4264.85 U2.A14@3788.76,4283.34 v1(3804.51,4267.59) ; v1(4696.57,4534.14) 4721.4,4534.14 4739.62,4515.92 4739.62,4491.75 RA1.2@4741.05,4490.32
  Sig2 w4.2: v1(3804.51,4267.59) 3804.51,4266.96 3820.08,4251.4 3854.51,4251.4 3870.73,4267.62 3870.73,4327.49 3890.02,4346.78 4188.8,4346.78 4193.92,4351.9 4234,4351.9 4239.12,4346.78 4346.9,4346.78 4357,4356.89 4369.1,4368.98 4384.04,4368.98 4426.37,4411.31 4478.66,4411.31 4514.77,4411.31 4514.83,4411.26 4578.4,4411.26 4604.7,4437.55 4604.7,4481.62 4610.23,4487.15 4633.97,4487.15 4680.96,4534.14 v1(4696.57,4534.14)
AR_PMIC_CLKOUT_SOP2: R85.1 R103.1 RA1.4 U2.V10 | length 994.8
  Top Layer w5.5: U2.V10@4324.2,4157.36 v1(4339.94,4173.11) ; v1(4690.56,4494.86) 4695.1,4490.32 RA1.4@4709.55,4490.32
  Sig2 w4.2: v1(4339.94,4173.11) 4337.92,4173.11 4321.73,4189.3 4271.61,4189.3 4261,4199.91 4261,4231.4 4230.16,4262.25 4230.16,4273.93 4240.02,4283.79 4251.79,4283.79 4261.2,4293.2 4261.2,4304.98 4271.44,4315.22 4384.1,4315.22 4418.24,4281.08 4418.24,4258.82 4427.09,4249.96 4529.46,4249.96 4587.77,4308.27 4587.77,4375 4650.65,4437.88 4650.65,4468.54 4646.07,4473.13 4646.07,4487.37 4653.46,4494.76 4686.25,4494.76 4686.34,4494.86 v1(4690.56,4494.86)
  Bottom Layer w5.5: v1(4339.94,4173.11) 4344.93,4178.09 R85.1@4344.93,4224.99 4344.93,4244.41 R103.1@4345.62,4245.1
AR_QSPI_CLK: R47.1 U2.H2 | length 649.9
  Top Layer w5.5: v1(3993.49,3921.14) U2.H2@4009.24,3905.39
  Sig2 w4.2: v1(3773.02,4015.63) 3662.13,4015.63 3654.68,4008.18 3654.68,3999.45 3663.21,3990.92 3706.39,3990.92 3740.15,3957.16 3769.11,3957.16 3800.25,3988.31 3850.05,3988.31 3861.17,3999.43 3944.27,3999.43 3963.34,3980.36 3987.4,3980.36 4008.79,3958.97 4008.79,3955.94 4008.98,3955.75 4008.98,3936.63 v1(3993.49,3921.14)
  Bottom Layer w5.5: R47.1@3734.37,4033.51 3755.94,4033.51 v1@3774.12,4015.33
AR_QSPI_CLK_T: R47.2 U9.6 | length 102.2
  Bottom Layer w5.5: R47.2@3734.37,4011.47 3747.4,4011.47 3757.25,4001.62 3757.25,3950.78 3750.99,3944.52 U9.6@3735.4,3944.52
AR_QSPI_CS: R43.1 U2.J2 U9.1 | length 773
  Top Layer w5.5: v1(4024.98,3921.14) U2.J2@4040.73,3905.39
  Sig1 w4.2: v1(3620.18,3859.13) 3620.18,3909.8 3625.67,3915.29 3629.69,3915.29 3648.37,3896.61 3652.38,3896.61 3658.41,3902.63 3658.41,3906.65 3639.73,3925.33 3639.73,3929.34 3647.76,3937.38 3652.78,3942.4 3652.87,3942.4 3667.07,3942.4 3678.43,3942.4 3681.27,3939.56 3681.27,3900.87 3684.11,3898.03 3692.63,3898.03 3695.47,3900.87 3695.47,3939.56 3698.31,3942.4 3706.83,3942.4 3709.67,3939.56 3709.67,3905.77 3712.51,3902.93 3721.03,3902.93 3723.87,3905.77 3723.87,3939.56 3726.71,3942.4 3730.97,3942.4 3735.14,3942.4 3771.98,3905.56 4009.4,3905.56 v1(4024.98,3921.14)
  Bottom Layer w5.5: v1(3620.18,3859.13) R43.1@3620.18,3875.43 3625.17,3880.41 U9.1@3625.17,3905.15
AR_QSPI_D0: R6.1 U2.H3 | length 707.5
  Top Layer w5.5: v1(3993.49,3952.63) U2.H3@4009.24,3936.89
  Sig2 w4.2: v1(3592.02,3967.77) 3592.02,4017.53 3600.59,4026.09 3616.46,4026.09 3635.24,4007.31 3635.24,3969.77 3656.25,3948.76 3776.34,3948.76 3804.94,3977.35 3852.64,3977.35 3861.17,3968.83 3881.68,3968.83 3897.15,3984.3 3944.55,3984.3 3957.91,3970.95 3975.17,3970.95 v1(3993.49,3952.63)
  Bottom Layer w5.5: v1(3592.02,3967.77) 3633.25,4009 3656,4009 3680.51,4033.51 R6.1@3706.27,4033.51
AR_QSPI_D0_T: R6.2 U9.5 | length 62.4
  Bottom Layer w5.5: R6.2@3706.27,4011.47 3706.27,3999.75 3720.96,3985.06 3720.96,3973.39 3730.15,3964.2 U9.5@3735.4,3964.2
AR_QSPI_D1: R46.1 U2.G2 | length 721.8
  Top Layer w5.5: v1(3961.99,3921.14) U2.G2@3977.74,3905.39
  Sig1 w4.2: v1(3576.23,3891.02) 3592,3906.8 3592,3933.42 3610.05,3951.47 3610.05,4005.15 3624.12,4019.22 3630.16,4019.22 3635,4014.38 3635,3994.04 3639.84,3989.2 3654.36,3989.2 3659.2,3994.04 3659.2,4019.22 3659.2,4021.32 3664.04,4026.16 3678.56,4026.16 3683.4,4021.32 3683.4,4019.22 3683.4,3994.04 3688.24,3989.2 3702.76,3989.2 3707.6,3994.04 3707.6,4014.38 3712.44,4019.22 3719.7,4019.22 3747.78,4019.22 3757.72,4009.29 3757.72,3944.96 3765.75,3936.93 3946.2,3936.93 v1(3961.99,3921.14)
  Bottom Layer w5.5: v1(3576.23,3891.02) 3583.61,3891.02 R46.1@3595.37,3902.79
AR_QSPI_D1_T: R46.2 U9.2 | length 29.8
  Bottom Layer w5.5: R46.2@3595.37,3924.83 U9.2@3625.17,3924.83
AR_QSPI_D2: R44.1 R48.1 U2.J3 | length 613.8
  Top Layer w5.5: v1(4024.98,3952.63) U2.J3@4040.73,3936.89
  Sig2 w4.2: v1(3567.42,4059.59) 3757.86,4059.59 3788.32,4029.13 3788.32,4010.18 3798.17,4000.33 3842.35,4000.33 3852.2,4010.18 3951.27,4010.18 3959.77,4001.69 3977.95,4001.69 4017.19,3962.45 4017.19,3960.43 v1(4024.98,3952.63)
  Bottom Layer w5.5: v1@3567.42,4059.85 R44.1@3608.37,4059.85 ; R48.1@3608.37,4032.12 R44.1@3608.37,4059.85 ; R44.1@3608.85,4059.85 R44.1@3608.37,4059.85
AR_QSPI_D2_T: R48.2 U9.3 | length 140
  Bottom Layer w5.5: R48.2@3608.37,4010.07 3580.6,4010.07 3572,4001.47 3572,3961.71 3589.2,3944.52 U9.3@3625.17,3944.52
AR_QSPI_D3: R45.1 R49.1 U2.K2 | length 775.9
  Top Layer w5.5: v1(4056.48,3921.14) U2.K2@4072.23,3905.39
  Sig2 w4.2: v1(3836.01,4015.63) 3820.71,4030.93 3820.71,4056.51 3779.9,4097.31 3779.9,4130.18 3806.63,4156.91 3843.24,4156.91 3851.54,4148.61 3851.54,4041.09 3864.63,4027.99 3929.74,4027.99 3949.45,4047.7 4022.42,4047.7 4040.28,4029.84 4040.28,3937.33 v1(4056.48,3921.14)
  Bottom Layer w5.5: R49.1@3771.3,3958.79 3783.11,3970.6 3790.39,3970.6 R45.1@3798.7,3978.91 3798.7,3993.8 3803.85,3998.95 3819.33,3998.95 v1(3836.01,4015.63)
AR_QSPI_D3_T: R49.2 U9.7 | length 40.8
  Bottom Layer w5.5: U9.7@3735.4,3924.83 3759.4,3924.83 R49.2@3771.3,3936.74
AR_RS232RX: R5.2 U2.V16 U18.6 | length 983.2
  Top Layer w5.5: v1@3613.41,4212.05 3626.27,4224.91 U18.6@3626.27,4303.01 ; U2.V16@4324.2,4346.33 v1(4339.94,4362.08) 4341.11,4363.24 R5.2@4378.13,4363.24
  Sig1 w4.2: v1(3613.41,4211.05) 3613.41,4243.04 3684.88,4314.52 3822,4314.52 3845.35,4337.86 4188.04,4337.86 4209.91,4315.99 4228.08,4315.99 4243.29,4331.19 4309.05,4331.19 v1(4339.94,4362.08)
AR_RS232RX_BT: R102.1 U15.4 | length 515.7
  Sig2 w4.2: v1(5569.37,4093.77) 5628,4093.77 5664.77,4130.54 5664.77,4267.23 v1(5631,4301)
  Bottom Layer w5.5: U15.4@5538.73,4044.92 5538.73,4063.13 v1(5569.37,4093.77) ; v1(5631,4301) 5640.41,4310.41 5650.41,4320.41 R102.1@5782.02,4320.41
AR_RS232TX: R4.2 U2.U16 U18.10 | length 866.6
  Top Layer w5.5: v1(3686.89,4429.01) R4.2@3706.52,4429.01 3706.7,4428.83 3706.7,4337.35 3698.93,4329.59 U18.10@3691.23,4329.59 ; U2.U16@4292.7,4346.33 v1(4308.45,4362.08)
  Sig1 w4.2: v1(3686.89,4429.01) 3668.77,4410.89 3668.77,4384.18 3706.68,4346.26 4292.63,4346.26 v1(4308.45,4362.08)
AR_RS232TX_BT: R90.1 U15.2 | length 610.2
  Sig2 w4.2: v1(5519.05,4092.71) 5536.97,4110.64 5536.97,4249.48 5590.96,4303.46 v1(5608.98,4303.46)
  Bottom Layer w5.5: U15.2@5499.36,4044.92 5499.36,4073.03 v1(5519.05,4092.71) ; v1(5608.98,4303.46) 5608.98,4320.91 5654.62,4366.55 5804.07,4366.55 5843.18,4327.44 5843.18,4323.71 5845.6,4321.29 R90.1@5847.4,4321.29
AR_SCL: J3.2 R8.1 R32.1 R51.1 R67.1 R70.2 R99.2 RA2.4 U2.G3 | length 4279.3
  Top Layer w5.5: R32.1@3551.93,4171 3564.93,4171 v1(3569.1,4166.83) ; v1(3961.99,3952.63) U2.G3@3977.74,3936.89 ; v1(4556.94,4458.91) 4556.98,4458.87 RA2.4@4556.98,4434.82
  Sig2 w4.2: v1(3961.99,3952.63) 3940.11,3974.52 3899.25,3974.52 3883.7,3958.97 3883.7,3944.07 3858.84,3919.21 3824.22,3919.21 3809.95,3904.94 3766.68,3904.94 3723.05,3861.32 3652.37,3861.32 3627.68,3886 3599,3886 3575.21,3862.21 3461.14,3862.21 3440.85,3882.5 3440.85,3908.85 3466,3934 3466,3996.25 3449.97,4012.28 3449.97,4113.76 3503.05,4166.83 v1(3569.1,4166.83) 3584.4,4182.13 3584.4,4207.33 3603.42,4226.35 3734.35,4226.35 3766,4258 3766,4270.44 3783.51,4287.95 3825.51,4287.95 3829.67,4283.79 3850.96,4283.79 3861.97,4294.8 3861.97,4334.16 3883.7,4355.89 3883.7,4368.42 3892.66,4377.38 4380.56,4377.38 4423.61,4420.43 4534.67,4420.43 4556.94,4442.7 v1(4556.94,4458.91) 4572.24,4474.21 4572.24,4516.44 4618.8,4563 4699.81,4563 4737.05,4525.76 4763.71,4525.76 4788.17,4501.3 4853.3,4501.3 4866.6,4488 5022,4488 5040.29,4506.29 J3.2@5040.29,4540.85 ; J3.2@5040.29,4542.38 J3.2@5040.29,4540.85 ; v1(5465.87,3862.46) 5429.07,3825.67 5355.06,3825.67 5308.27,3872.46 5308.27,3997.83 5180.09,4126.01 v1(5180.09,4207.42) 5141.3,4246.21 5141.3,4337.34 5139.28,4339.36 5139.28,4454.72 5105.21,4488.79 5092.35,4488.79 J3.2@5040.29,4540.85
  Bottom Layer w5.5: R8.1@3927.41,3972.12 3940.25,3972.12 3959.73,3952.63 v1(3961.99,3952.63) ; J3.2@5040.29,4542.38 5086.17,4496.5 5175.34,4496.5 5192.31,4479.52 R99.2@5212.09,4479.52 ; v1(5180.09,4207.42) 5180.09,4233.18 5200.07,4253.16 R51.1@5230.37,4253.16 ; R70.2@5448.17,3870.14 5455.84,3862.46 v1(5465.87,3862.46) 5495.58,3892.17 R67.1@5495.58,3935.46
AR_SDA: J3.3 R7.1 R28.1 R57.1 R68.1 R71.2 R101.2 RA2.3 U2.G1 | length 4307.7
  Top Layer w5.5: R28.1@3551.59,4193 3569,4193 v1(3569.1,4192.9) ; v1(3961.99,3858.15) U2.G1@3977.74,3873.89 ; v1(4556.94,4486) 4557,4486 4574.69,4468.31 4574.69,4451.56 4572.73,4449.6 RA2.3@4572.73,4434.82 ; v1(5420.37,3842.92) 5439.83,3823.46 5459.89,3823.46 5495.58,3859.15 R68.1@5495.58,3935.46
  Sig2 w4.2: v1(3961.99,3858.15) 3959.97,3858.15 3944.67,3873.45 3750.16,3873.45 3729.32,3852.6 3649.2,3852.6 3625.9,3875.9 3601.9,3875.9 3578,3852 3455.21,3852 3431,3876.21 3431,3914 3457,3940 3457,3993.37 3441.57,4008.8 3441.57,4117.23 3508.43,4184.09 3560.29,4184.09 v1(3569.1,4192.9) 3569.1,4207.7 3596.15,4234.75 3730.32,4234.75 3757.6,4262.04 3757.6,4281.66 3776.54,4300.6 3804.66,4300.6 3831.23,4327.17 3831.23,4381.04 3859.96,4409.77 4347.13,4409.77 4361.3,4395.61 4382.28,4395.61 4415.74,4429.07 4527.1,4429.07 4541.64,4443.61 4541.64,4470.7 v1(4556.94,4486) 4556.94,4524.29 4604.62,4571.97 4705.61,4571.97 4743.42,4534.16 4767.19,4534.16 4791.65,4509.7 4878.6,4509.7 4888.65,4499.65 4948.2,4499.65 4958.26,4509.72 4958.26,4565.39 4966.01,4573.14 5059.53,4573.14 J3.3@5090.29,4542.38 5169.88,4462.79 5169.88,4247.04 5205.89,4211.03 v1(5205.89,4161.98) 5226.47,4141.41 5226.47,4092.33 5316.67,4002.12 5316.67,3875.94 5349.69,3842.92 v1(5420.37,3842.92)
  Bottom Layer w5.5: R7.1@3944.52,3878.69 3944.52,3875.62 v1(3961.99,3858.15) ; J3.3@5090.29,4542.38 5122.21,4510.46 R101.2@5212.35,4510.46 ; R57.1@5180.56,4161.98 v1(5205.89,4161.98) ; R71.2@5383.33,3780.67 5383.86,3781.2 5404.84,3781.2 5420.37,3796.73 v1(5420.37,3842.92)
AR_SOP0: R83.2 R158.2 R159.1 R174.2 | length 105.5
  Bottom Layer w5.5: R159.1@4223.5,4089.12 4223.5,4089.91 4227.05,4093.46 4236,4093.46 4239.22,4096.68 R158.2@4239.22,4119.6 4241.84,4122.21 4266.49,4122.21 R174.2@4269.1,4124.82 4268.19,4125.73 4268.19,4154.39 R83.2@4267.28,4155.3
AR_SOP1: R84.2 R170.2 R171.1 | length 100.6
  Bottom Layer w5.5: R84.2@4130.41,3922.4 4130.41,3933.54 R170.2@4143.32,3946.46 4143.32,3958.65 4148.32,3963.64 4176.89,3963.64 R171.1@4193.42,3980.18
AR_SOP2: R85.2 R172.2 R176.2 | length 111
  Bottom Layer w5.5: R85.2@4365.96,4224.99 4396.89,4224.99 4408.3,4213.57 4408.3,4189.48 R176.2@4400.62,4181.8 4401.11,4181.32 R172.2@4401.11,4153.05
AR_SPICLK1: R75.2 R136.2 U2.D2 | length 3190
  Top Layer w5.5: U2.D2@3883.25,3905.39 v1(3899,3889.64) ; R136.2@6248.02,4241 6248.02,4230.98 6252,4227 v1(6273,4227)
  Sig1 w4.2: v1(4524,3826) 4581.48,3826 4608.47,3799.01 4608.47,3787.53 4624.78,3771.22 4772.81,3771.22 4797.6,3796 4797.6,3816.6 4846.6,3865.6 4846.6,3873.19 4938.65,3965.25 5055.93,3965.25 5123.42,3897.75 5123.42,3847.22 5135.92,3834.72 5135.92,3722.08 5148.37,3709.63 5166.58,3709.63 5196.33,3739.38 5500.17,3739.38 5637.8,3877.01 5637.8,3944.8 5651.7,3958.7 5695.8,3958.7 5729.1,3992 6231,3992 6282,4043 6282,4218 v1(6273,4227)
  Sig2 w4.2: v1(3899,3889.64) 3940.35,3889.64 3956.55,3873.45 3999.83,3873.45 3999.93,3873.34 4050.25,3873.34 4050.36,3873.45 4346.28,3873.45 4361.54,3858.19 4494.81,3858.19 4523,3830 4523,3827 v1(4524,3826)
  Bottom Layer w5.5: R75.2@3875.37,3896.78 3891.86,3896.78 v1(3899,3889.64)
AR_SYNC_IN: RA8.8 U2.U12 | length 931.4
  Top Layer w5.5: U2.U12@4292.7,4220.35 v1(4308.45,4204.6)
  Sig2 w4.2: v1(4308.45,4204.6) 4344.14,4204.6 4367.21,4181.54 4397.56,4181.54 4415.59,4199.56 4550.34,4199.56 4560.42,4209.65 4717.42,4209.65 4759.2,4251.43 4759.2,4251.65 4780.03,4272.48 4891.89,4272.48 4996.41,4167.96 4996.41,4093.05 v1(4971.61,4068.25)
  Bottom Layer w5.5: RA8.8@4952.69,4072.25 4967.61,4072.25 v1(4971.61,4068.25)
AR_SYNC_OUT_SOP1: R84.1 RA8.7 U2.M3 | length 1135.8
  Top Layer w5.5: v1(4119.47,3952.63) U2.M3@4135.22,3936.89
  Sig2 w4.2: v1(4119.47,3952.63) 4167.16,4000.33 4313.89,4000.33 4325.09,3989.12 4325.09,3946.41 4377.92,3893.59 4525.16,3893.59 4545.46,3873.29 4650.44,3873.29 4695.78,3918.63 4821.98,3918.63 4947.18,4043.83 4947.18,4067.33 v1(4973.31,4093.46)
  Bottom Layer w5.5: R84.1@4109.37,3922.4 4109.37,3942.53 v1(4119.47,3952.63) ; RA8.7@4952.69,4088 4967.85,4088 v1(4973.31,4093.46)
AR_TCK: RA4.2 U2.T3 | length 552.9
  Top Layer w5.5: v1(4245.46,3952.63) U2.T3@4261.2,3936.89 ; v1@4532.81,3949.39 v1(4535.35,3946.85) 4544.91,3937.29 4573.76,3937.29 4579.07,3931.99 4604.64,3931.99 4612.69,3940.04 RA4.2@4612.69,3946.67
  Bottom Layer w5.5: v1(4245.46,3952.63) 4246.46,3951.63 4335.33,3951.63 4388.35,4004.65 4388.35,4024.15 4414.2,4050 4514.75,4050 4532.92,4031.83 4532.92,3949.29 v1(4535.35,3946.85)
AR_TDI: RA4.4 U2.U9 | length 705.9
  Top Layer w5.5: U2.U9@4292.7,4125.86 4307.32,4111.24 4353.47,4111.24 4361.57,4103.14 4361.57,4065.53 4367.7,4059.39 4391,4059.39 4401.46,4048.93 4401.46,4040.6 4393.56,4032.7 4363.3,4032.7 4357.05,4026.45 4357.05,4000.45 4361.5,3996 4389.59,3996 4401.46,3984.13 4401.46,3952.48 4437.05,3916.9 4536.15,3916.9 4599.89,3853.17 4624.33,3853.17 4656.39,3885.22 4656.39,3934.47 RA4.4@4644.19,3946.67
AR_TDO_SOP0: R83.1 RA4.3 U2.U10 | length 595.3
  Top Layer w5.5: U2.U10@4292.7,4157.36 v1(4308.45,4141.61) ; v1(4559.05,3919.14) 4617.44,3919.14 4628.44,3930.13 RA4.3@4628.44,3946.67
  Sig2 w4.2: v1(4308.45,4141.61) 4332.17,4117.89 4378.11,4117.89 4436.42,4059.59 4541.61,4059.59 4588.41,4012.78 4588.41,3924.98 4582.57,3919.14 v1(4559.05,3919.14)
  Bottom Layer w4.2: R83.1@4288.32,4155.3 4301.27,4155.3 4308.45,4148.13 4308.45,4145.34 v1(4308.45,4141.61)
AR_TMS: RA4.1 U2.U8 | length 528
  Top Layer w5.5: U2.U8@4292.7,4094.37 v1(4308.45,4078.62) ; v1(4559.88,3955.04) 4577.77,3955.04 4586.24,3946.57 4596.85,3946.57 RA4.1@4596.94,3946.67
  Sig2 w4.2: v1(4308.45,4078.62) 4308.45,4099.58 4316.49,4107.62 4376.5,4107.62 4379.39,4104.74 4379.39,4070.75 ; 4379.05,4070.75 4371.62,4063.31 4371.62,4034.19 4376.26,4029.55 4406,4029.55 4422.02,4045.57 4540.04,4045.57 4574.54,4011.06 4574.54,3957.33 4572.26,3955.04 v1(4559.88,3955.04)
AR_VBGAP: C69.1 U2.A16 | length 59.2
  Top Layer w10: C69.1@3734.67,4334 3776.43,4334 U2.A16@3788.76,4346.33
AR_VOUT_PA: C70.1 C73.1 C74.1 C75.1 C76.1 FL1.2 U2.G16 U2.G17 U2.G18 | length 66.8
  Top Layer w10: v1(3961.99,4362.08) U2.G16@3977.74,4346.33 ; v1(3961.99,4393.58) U2.G17@3977.74,4377.83 ; v1(3961.99,4425.07) U2.G18@3977.74,4409.33
AR_WARMRST: R23.1 RA1.3 U2.U13 | length 737.3
  Top Layer w5.5: v1(4276.95,4267.59) U2.U13@4292.7,4251.85 ; v1(4661.37,4479.46) 4661.37,4494.02 4680.05,4512.7 4710.79,4512.7 4725.3,4498.19 RA1.3@4725.3,4490.32
  Sig2 w4.2: v1(4276.95,4267.59) 4301,4291.65 4368.95,4291.65 4386.74,4273.85 4386.74,4261.99 4396.6,4252.14 4413.04,4252.14 4423.61,4241.56 4532.94,4241.56 4596.17,4304.79 4596.17,4371.52 4661.37,4436.72 v1(4661.37,4479.46)
  Bottom Layer w5.5: v1(4276.95,4267.59) 4287.51,4267.59 4290.72,4264.38 R23.1@4290.72,4249.29
AR_XTAL_N: C71.2 U2.B7 Y1.3 | length 159.9
  Top Layer w4: Y1.3@3678.09,4056.69 3720.4,4056.69 C71.2@3722.86,4054.22 3752.95,4054.22 3777.47,4078.74 3804.39,4078.74 U2.B7@3820.26,4062.87
AR_XTAL_P: C14.2 R109.1 U2.A7 Y1.1 | length 223.3
  Top Layer w4: Y1.1@3622.98,4013.38 3646.72,3989.63 3697.93,3989.63 3704.65,3996.36 3704.65,4009.85 3707.19,4012.38 R109.1@3719.34,4012.38 3719.34,4028.55 3729.93,4039.14 3753.21,4039.14 3776.95,4062.87 U2.A7@3788.76,4062.87
BB_1V8: C55.1 C56.1 C57.1 C58.1 FL8.2 U2.M16 U2.M17 U2.M18 | length 89.1
  Top Layer w10: U2.M16@4135.22,4346.33 v1(4150.97,4362.08) U2.M17@4135.22,4377.83 v1(4150.97,4393.58) ; U2.M18@4135.22,4409.33 v1(4150.97,4425.07)